# Altium PCB PCB2.PcbDoc
Units mil, origin at the board's own origin, x right, y up, seen from the top; angles counter-clockwise.
Board outline 1920.44 x 1920.44 mil, 2 copper layers (Top Layer, Bottom Layer); 12 components, 4 nets, 48 pads, 10 vias.
Unrouted connection lines stored in the file: 7.
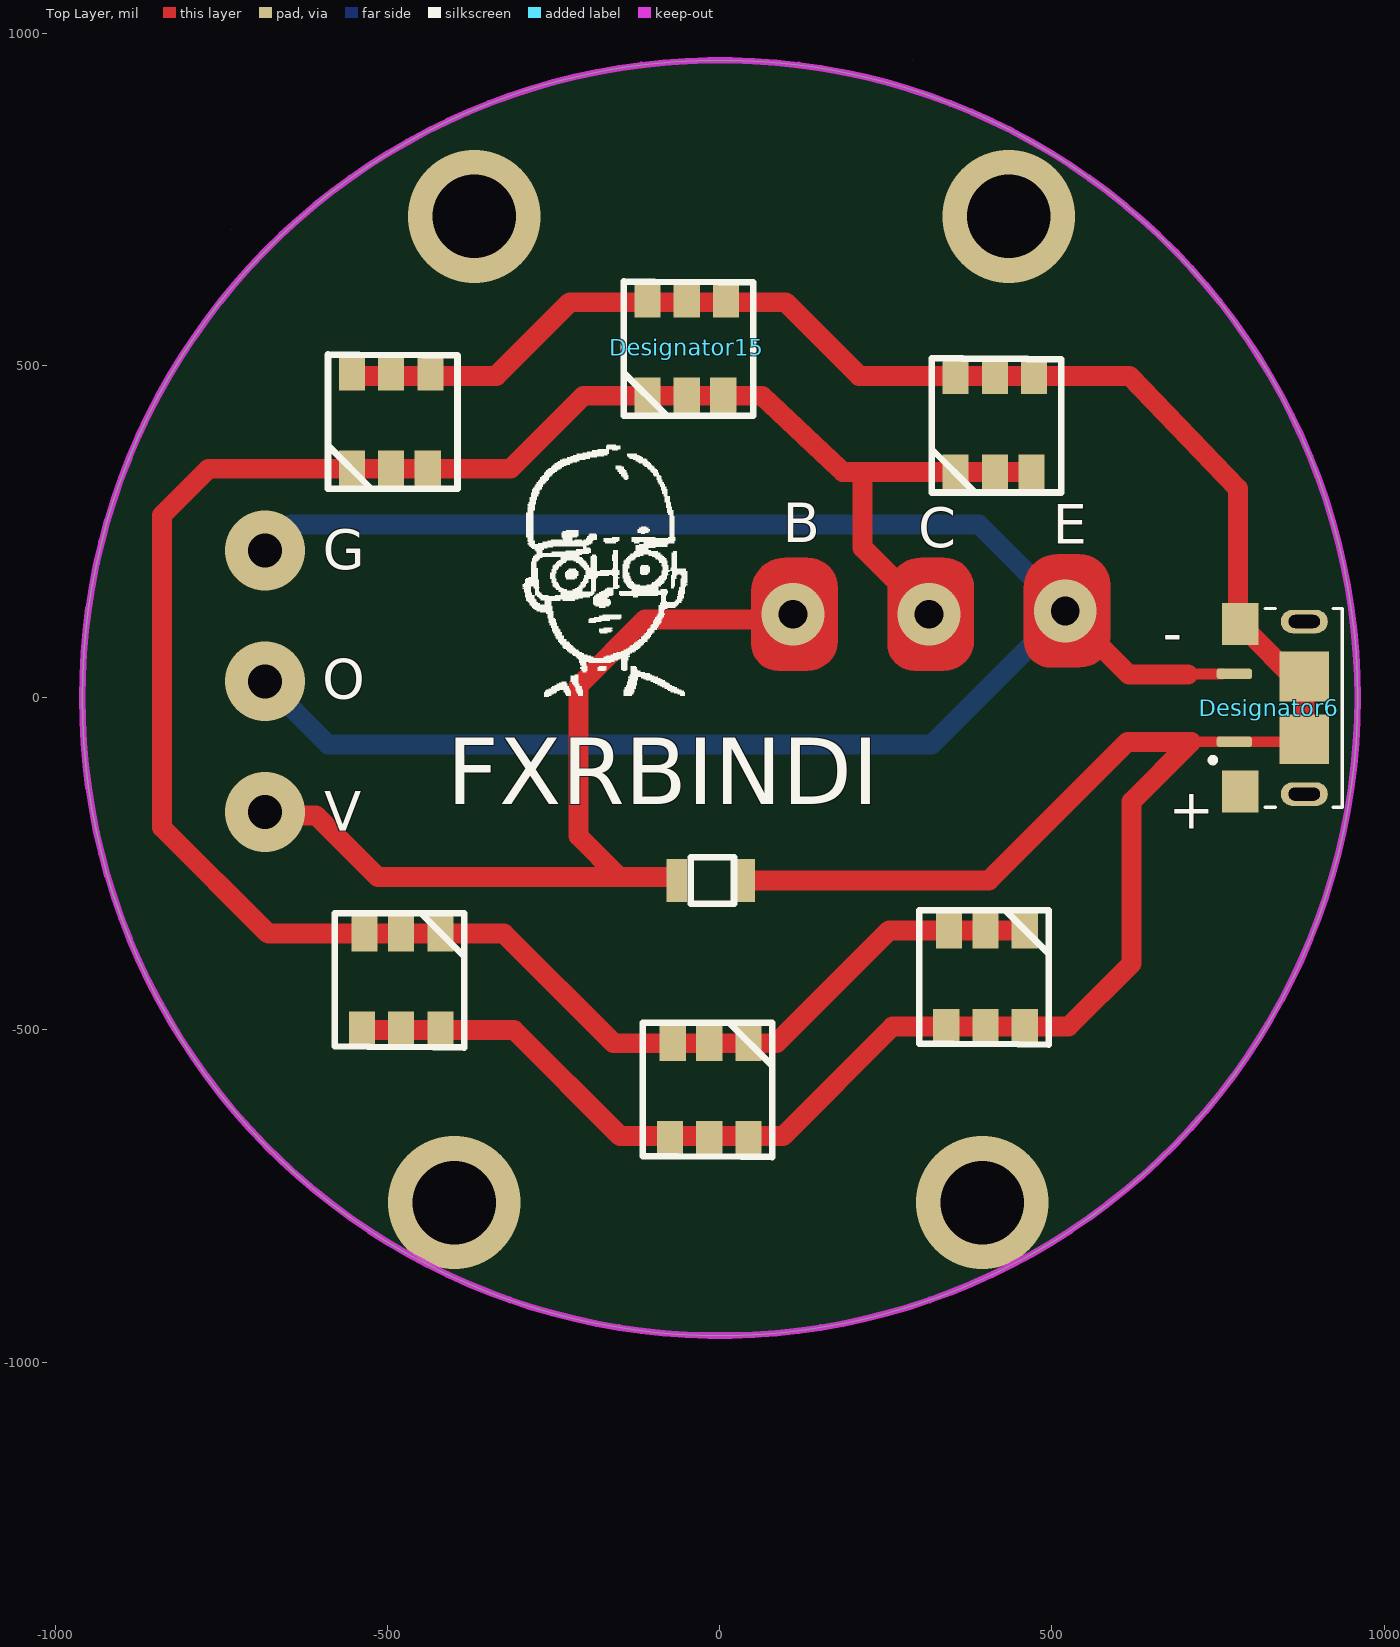
[diagram p0: Top Layer view]
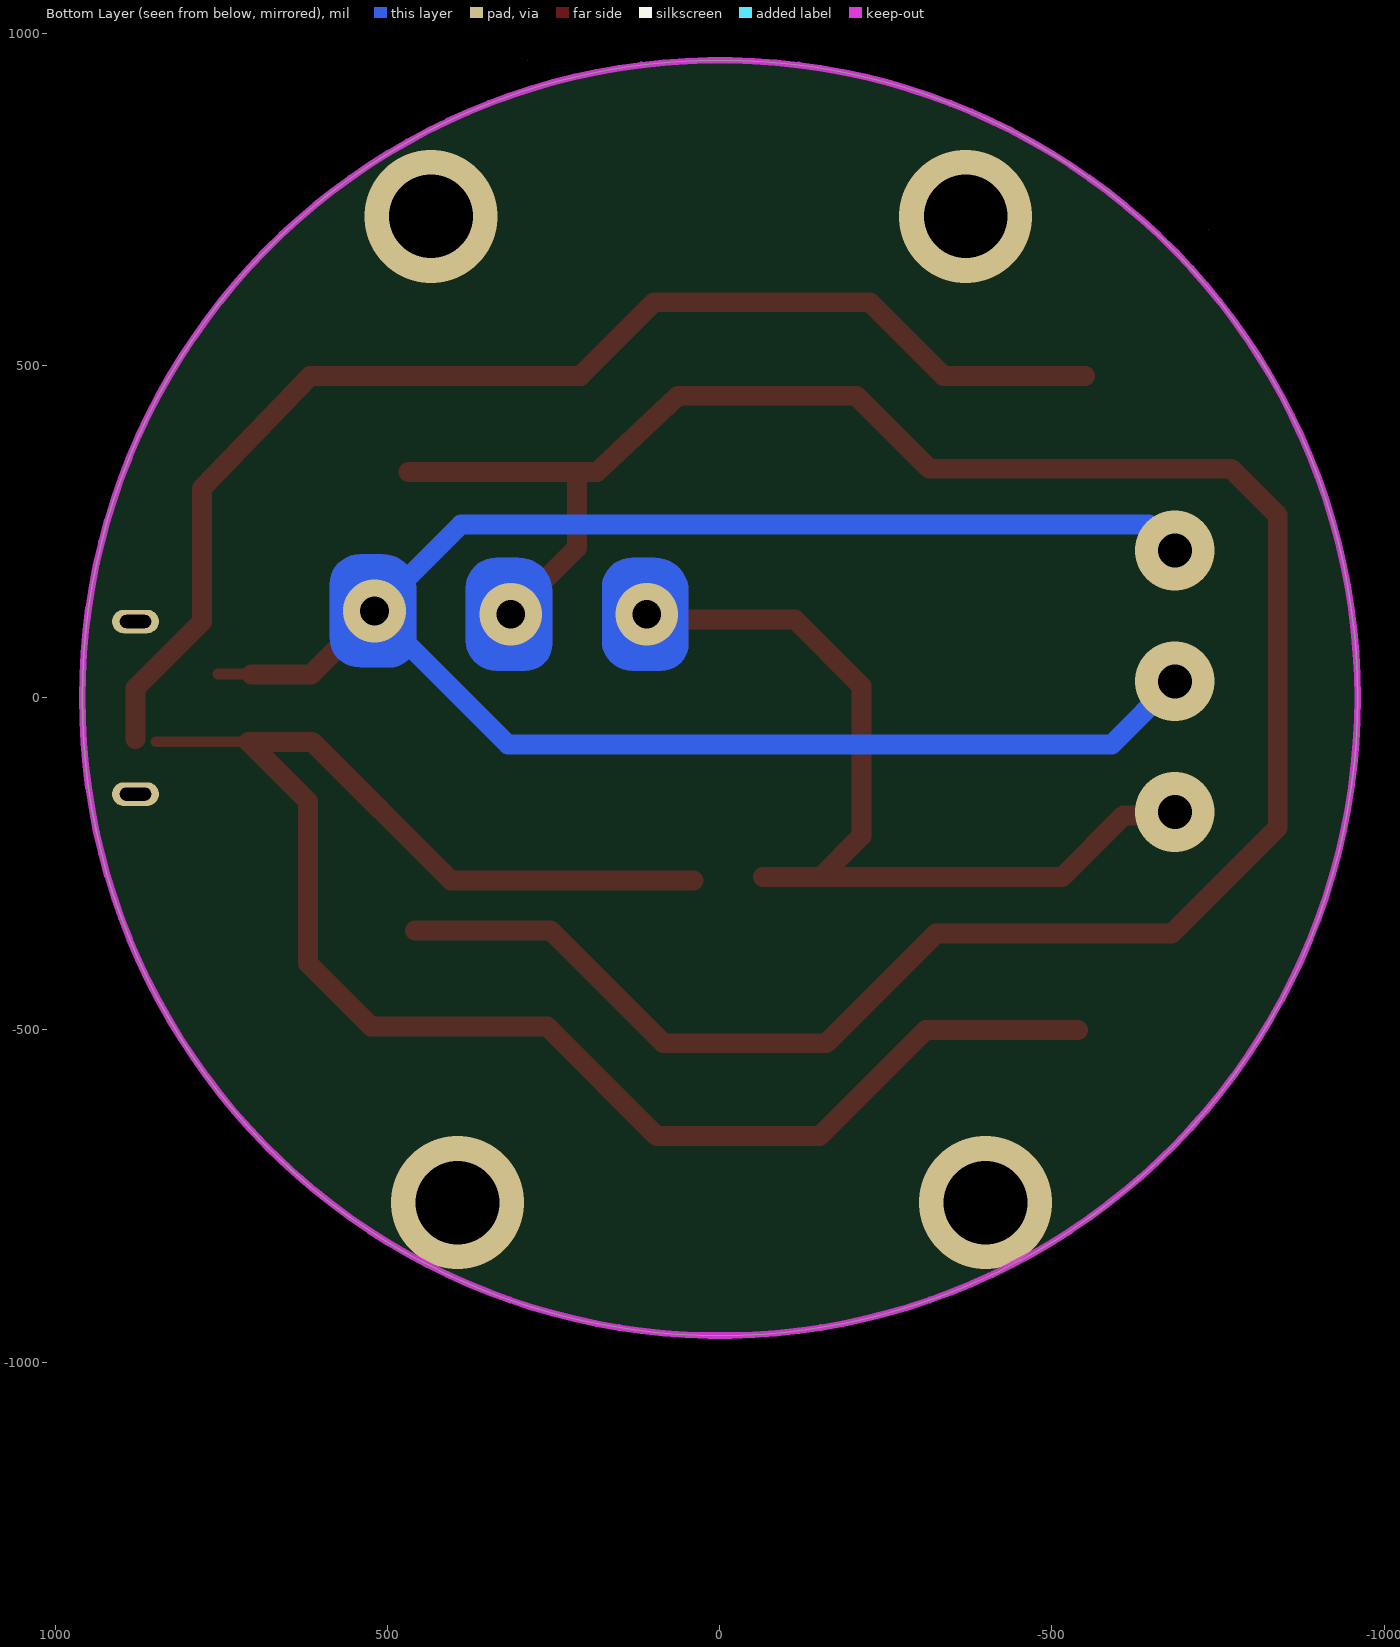
[diagram p1: Bottom Layer view, seen from below]

## Layer stack, top to bottom
Top Solder: solder mask 0.4, Solder Resist, Dk 3.5
Top Layer: signal copper 1.4
Dielectric 1: dielectric 12.6, FR-4, Dk 4.8
Bottom Layer: signal copper 1.4
Bottom Solder: solder mask 0.4, Solder Resist, Dk 3.5

## Board outline
-960.22,0 ccw(c0,0) 0,-960.22 ccw(c0,0) 960.22,0 ccw(c0,0) 0,960.22 ccw(c0,0)
cut-out: -735,705
cut-out: 290,960

## Design rules (kind name [scope] priority, off if disabled: settings)
Clearance [All] p1: gap=10 ignorepadtopadclearanceinfootprint=FALSE except(0: Arc-Hole Track-Hole SMDPad-Hole THPad-Hole Via-Hole Fill-Hole Poly-Hole Region-Hole Text-Hole)
PolygonConnect [All] p1: connectstyle=Relief reliefconductorwidth=10 reliefentries=4 polygonreliefangle="90 Angle" airgapwidth=10
RoutingVias [All] p1: holewidth=28 width=50 viastyle="Through Hole" minholewidth=28 minwidth=50 maxholewidth=28 maxwidth=50
SolderMaskExpansion [All] p1: expansion=4
Width [All] p1: maxlimit=10 minlimit=10 preferedwidth=10
30 further rules are at their usual default settings.

## Components (designator, comment, footprint, x,y, rotation, side; value= is the part's Value field where it differs from the comment)
Designator5 "Comment" PCBComponent_1 1325,185 r90 top
Designator6 "Comment" FCI_10118193-0001LF 880,-14.92 r90 top
Designator15 "Comment" "SDM LED5050" -50,520 r270 top
R? "2.7k" SDM1206 -13.82,-275 r180 top
? "Comment" BC337 315,126 r180 top
? "Comment" VR1K -685,25 r90 top
? "Comment" "SDM LED5050" 414.06,404.29 r270 top
? "Comment" "SDM LED5050" -480,-419.29 r90 top
? "Comment" "SDM LED5050" -15.94,-584.29 r90 top
? "Comment" "SDM LED5050" 400,-415 r90 top
? "Comment" "SDM LED5050" -495,410 r270 top
? "Comment" PCBComponent_1 65,-355 r90 top

## Footprints (in the part's own frame and the unit in brackets; to place one, negate y for a bottom-side part, rotate by r counter-clockwise, add the part's x,y. Pads: shape width x height; smd on the part's side, far side on the other; paste and mask are expansions set on the pad)
BC337 [mil]
  Multi-Layer region: -272.5,-45 -272.5,35 -266.47,57.5 -250,73.97 -227.5,80 -227.5,80 -182.5,80 -167.19,76.96 -154.21,68.29 -145.54,55.31 -142.5,40 -142.5,40 -142.5,-39.99 -149.2,-65 -167.5,-83.3 -192.5,-90 -192.5,-90 -227.5,-90 -244.72,-86.57 -259.32,-76.82 -269.07,-62.22 -272.5,-45
  Multi-Layer region: 137.5,-40 137.5,40 143.53,62.5 160,78.97 182.5,85 182.5,85 227.5,85 242.81,81.96 255.79,73.29 264.46,60.31 267.5,45 267.5,45 267.5,-34.99 260.8,-60 242.5,-78.3 217.5,-85 217.5,-85 182.5,-85 165.28,-81.57 150.68,-71.82 140.93,-57.22 137.5,-40
  Multi-Layer region: -67.5,-40 -67.5,40 -61.47,62.5 -45,78.97 -22.5,85 -22.5,85 22.5,85 37.81,81.96 50.79,73.29 59.46,60.31 62.5,45 62.5,45 62.5,-34.99 55.8,-60 37.5,-78.3 12.5,-85 12.5,-85 -22.5,-85 -39.72,-81.57 -54.32,-71.82 -64.07,-57.22 -67.5,-40
FCI_10118193-0001LF [mm]
  rrect50% 0.4x1.35 smd: 1(-1.3,2.675) 5(1.3,2.675)
  rect 1.6x1.4 smd: S1(-3.2,2.45) S2(3.2,2.45)
  rect 1.9x1.9 smd: S3(1.2,0) S4(-1.2,0)
  oval 0.9x1.8 hole 0.5 slot 1.2 at 90 deg: S5(-3.3,0) S6(3.3,0)
  round 0.5 hole 0.5 unplated: ""(-3.3,0) ""(3.3,0)
  silkscreen extent -3.8,-1.45 3.8,3.6
PCBComponent_1 [mil]
SDM1206 [mm]
  rect 0.8x1.65 smd: 1(-1.3,0) 2(1.3,0)
  silkscreen extent -0.89,-0.89 0.76,0.89, body extent -1.6,-0.8 1.6,0.8, height 0.5
"SDM LED5050" [mm]
  rect 1.4x1 smd: 1(-2.05,1.5) 1(1.651,-1.5) 2(-2.05,0) 3(-2.05,-1.5) 4(1.651,1.397) 5(1.651,0)
  silkscreen extent -2.72,-2.41 2.41,2.54, body extent -2.83,-2.46 2.57,2.54, height 1.62
VR1K [mil]

## Part data
R?: library part res

## Via types
v1: diameter 94.49, hole 43.31, Top Layer to Bottom Layer, 3 vias
v2: diameter 120, hole 51.18, Top Layer to Bottom Layer, 3 vias
v3: diameter 200, hole 125.98, Top Layer to Bottom Layer, 3 vias
v4: diameter 200/200 (per signal layer), hole 125.98, Top Layer to Bottom Layer, 1 vias

## Nets (pads, with @x,y where several pads share a name; then routed paths per layer and width w, separated by ;. In a path a pad name is that pad's centre, name@x,y a point inside that pad or via, vN(x,y) a via of type N, cw(c..) or ccw(c..) an arc to the next point about the centre after c; other vN are vias at no path point)
Net*?_1: ?.1@43.11,-519.29 ?.2@414.06,485 ?.3@355,485 ?.3@-420.94,-500 ?.5@-15.94,-519.29 R?.2
Net*?_4: ?.1@459.06,-350 ?.4@345,-350 ?.5@400,-350
Net*_1: R?.1
Net*_2: 
pads on no net: ?.1@340.94,-495.71 ?.1@355,339.29 ?.1@473.11,485 ?.1@-75,-665 ?.1@-420.94,-354.29 ?.1@-435.94,490.71 ?.1@-539.06,-500 ?.1@-554.06,345 ?.2@400,-495.71 ?.2@-15.94,-665 ?.2@-480,-500 ?.2@-495,490.71 ?.3@43.11,-665 ?.3@459.06,-495.71 ?.3@-554.06,490.71 ?.4@469.06,339.29 ?.4@-70.94,-519.29 ?.4@-440,345 ?.4@-535,-354.29 ?.5@414.06,339.29 ?.5@-480,-354.29 ?.5@-495,345 Designator6. Designator6.1 Designator6.5 Designator6.S1 Designator6.S2 Designator6.S3 Designator6.S4 Designator6.S5 Designator6.S6 Designator15.1 Designator15.2 Designator15.3 Designator15.4 Designator15.5
copper on no net: | length 12528.1
  Top Layer w10: -150,-275 -65,-275 ; 876.06,-66.1 880,-62.17
  Top Layer w16: 696,36 756,36 ; 709.76,-66 849,-66
  Top Layer w30: v2@-705,-176.85 -608.15,-176.85 -515,-270 -65,-270 ; -550,485 -336.65,485 -225.94,595.71 95,595.71 ; -539.06,-500 -310,-500 -150,-660 95,-660 260,-495 525,-495 620,-400 620,-315 620,-155.87 709.76,-66.1 613.9,-66.1 405,-275 40,-275 ; -153,-268 -213,-208 -213,18 -113,118 v1@110,118 ; 99.06,595.71 209.76,485 617,485 780,315 780,114.61 880,14.61 880,-62.17 ; 180,345 63.28,455 -205.24,455 -315.24,345 -770,345 -840,275 -840,-195 -680,-355 -325,-355 -160,-520 85,-520 255,-350 459.06,-350 ; 185,340 469.06,340 ; 215,335 215,226 v1(315,126) ; 275,160 v1@304,131 ; v1(520,131) 616,35 705,35
  Bottom Layer w30: v2(-685,25) -590,-70 319,-70 v1(520,131) 390,261 -645.85,261 v2(-685,221.85)
  other v1: 110,126
  other v2: -685,-171.85
  other v3: -400,-760 395,-760 435,725
  other v4: -370,725

## Keep-outs
Keep-Out Layer:
  circle w10: c0,0 r960.22

## Other copper
Top Layer:
  pour cut-out: 300,180
  pour cut-out: 950,-1340
Multi-Layer:

## Silkscreen, mask and mechanical layers (free items; w line width, h text height)
Top Overlay:
  drawing of 12 lines, arcs and shapes, not listed
  text "B" at 95,234 h60
  text "E" at 501,232 h60
  text "C" at 299,227 h60
  text "G" at -598,194 h60
  text "-" at 667,68 h60
  text "O" at -599,-1 h60
  text "FXRBINDI" at -411,-160 h100
  text "+" at 676,-197 h60
  text "V" at -596,-200 h60
Top Solder:
  pour cut-out: -150,120